# EAGLE board pwm-board (EAGLE 4.16)
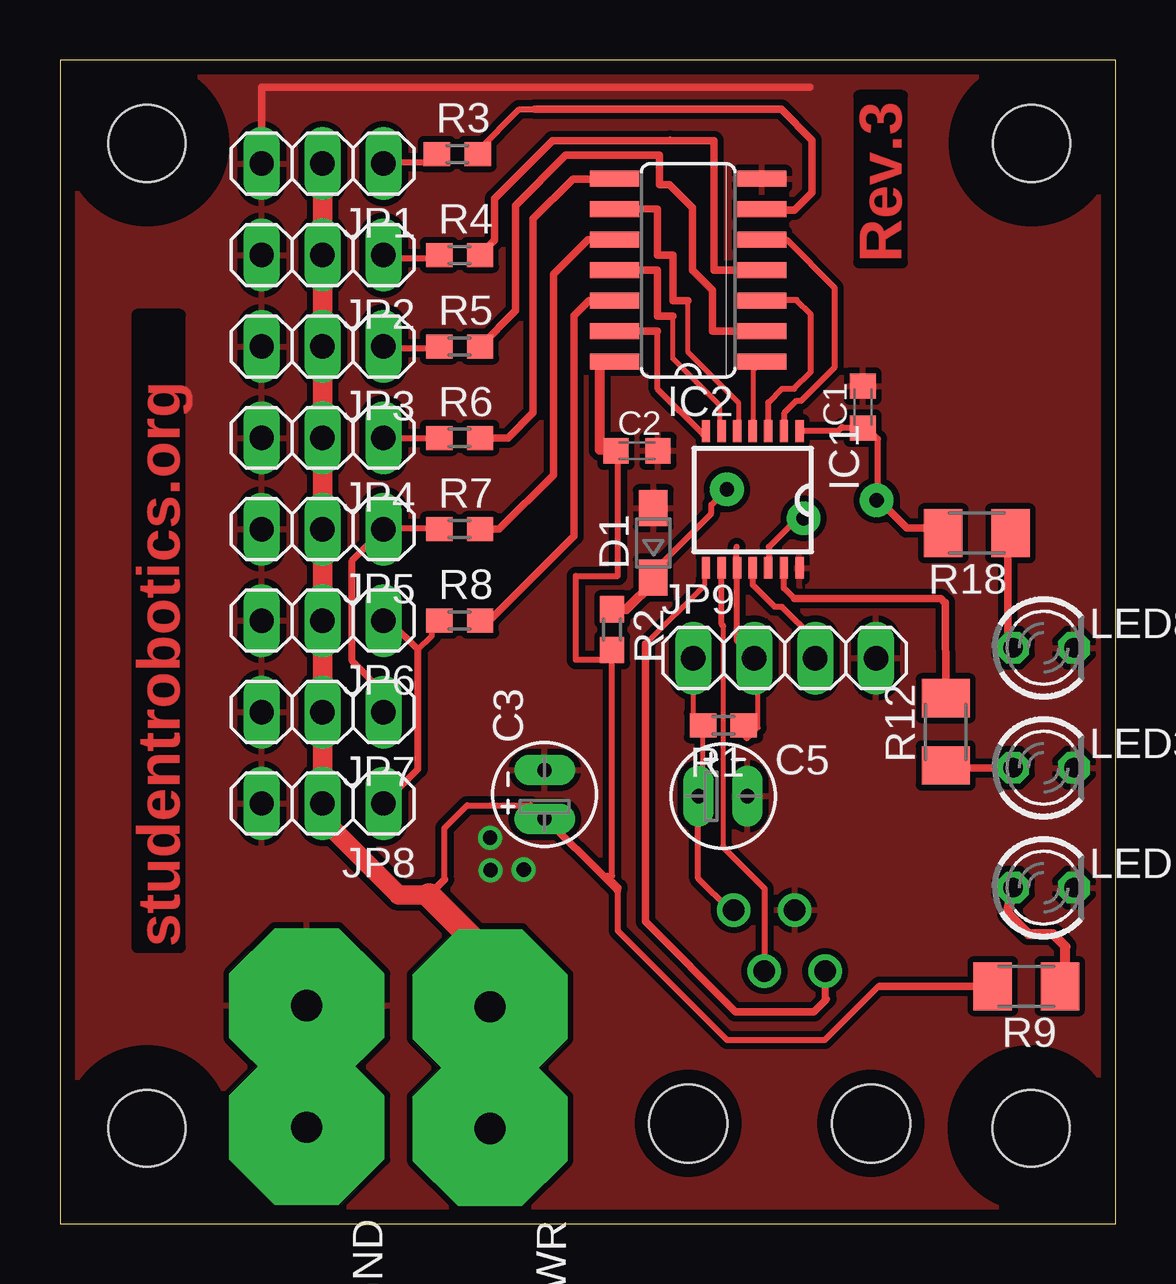
[diagram p0: board, top side]
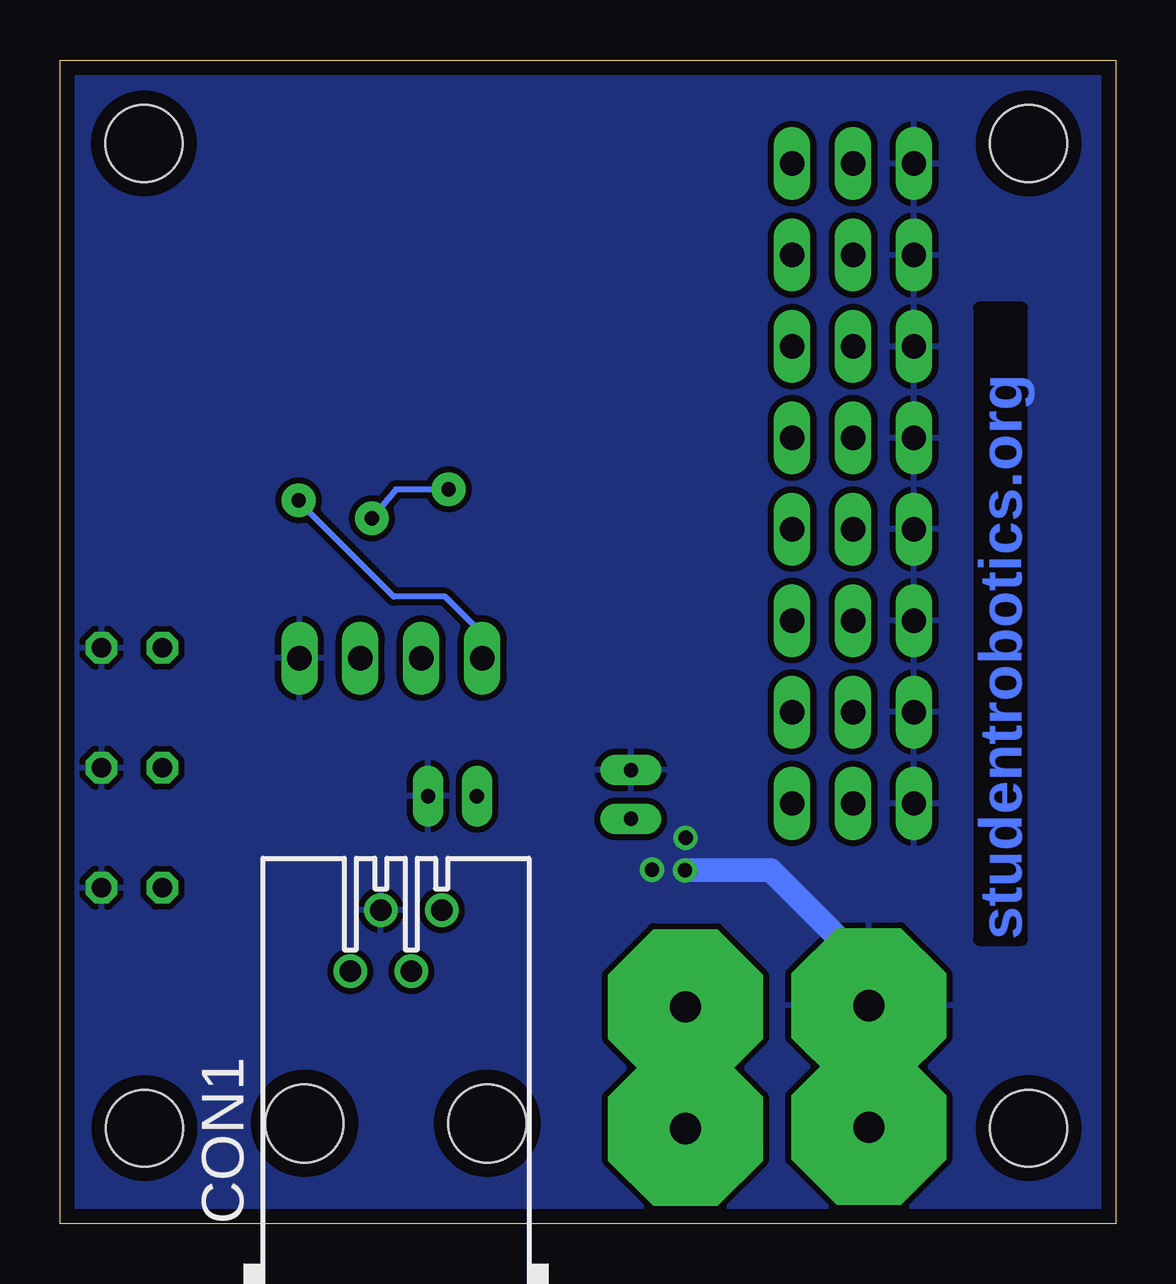
[diagram p1: board, bottom side, seen from below]

Size 44 x 48.5 mm. Coordinates in mm from the lower left corner, seen from the top.
Outline: 0,48.5 0,0 44,0 44,48.5 0,48.5
Copper layers (1*16): Top 0.035mm / dielectric 1.5mm / Bottom 0.035mm
Design rules "default": minimum track width 0.2mm, minimum drill 0.6mm, track to track 0.2mm, track to pad 0.2mm, pad to pad 0.2mm, via to via 0.2mm, smd to smd 0mil, copper to edge 0.6mm, drill to drill 8mil, minimum pad ring 10mil, minimum via ring 8mil, stop-mask expansion 4mil, vias tented up to drill 0mil, thermal gap 10mil
Holes 3.2 mm at 3.62,45.02 40.48,3.98 40.5,45.02 3.62,3.98
tRestrict: area 37.5,42 to 43.5,48; area 37.5,1 to 43.5,7; area 0.6,1 to 6.6,7; area 0.6,42 to 6.6,48

## Footprints (pad centres in the part's own frame; a part is rotated, then mirrored left to right if it is on the bottom)
C0603K = smd 1.05 x 1.08: 1 -0.875,0; 2 0.875,0
E2-4_0.6MMDRILL = drill 0.6 pad 1.27 long: + -1.016,0; - 1.016,0
RJ11-4P4C = drill 0.889 round: 1 1.905,8.89; 2 0.635,6.35; 3 -0.635,8.89; 4 -1.905,6.35 | hole 3.251: -3.81,0; 3.81,0
SOD323-W = smd 1.5 x 1.2: A 1.45,0; C -1.45,0
SPADE = drill 1.3 pad 6.452 octagon: P$1 -5.08,-3.175; P$2 0,-3.175
TSSOP14 = smd 0.9 x 0.35: 1 -2.875,1.95; 2 -2.875,1.3; 3 -2.875,0.65; 4 -2.875,0; 5 -2.875,-0.65; 6 -2.875,-1.3; 7 -2.875,-1.95; 8 2.825,-1.95; 9 2.825,-1.3; 10 2.825,-0.65; 11 2.825,0; 12 2.825,0.65; 13 2.825,1.3; 14 2.825,1.95
SO14 = smd 0.66 x 2.032: 1 -3.81,-3.073; 2 -2.54,-3.073; 3 -1.27,-3.073; 4 0,-3.073; 5 1.27,-3.073; 6 2.54,-3.073; 7 3.81,-3.073; 8 3.81,3.073; 9 2.54,3.073; 10 1.27,3.073; 11 0,3.073; 12 -1.27,3.073; 13 -2.54,3.073; 14 -3.81,3.073
1X03 = drill 1.016 long: 1 -2.54,0; 2 0,0; 3 2.54,0
1X04 = drill 1.016 long: 1 -3.81,0; 2 -1.27,0; 3 1.27,0; 4 3.81,0
LED3MM = drill 0.813 octagon: A -1.27,0; K 1.27,0
R0603 = smd 1.1 x 1: 1 -0.85,0; 2 0.85,0
M1206 = smd 1.6 x 2: 1 -1.4,0; 2 1.4,0

## Placement (x,y rotation side)
C1  100nF  [C0603K]  33.47,34.03 90 top
C2  100nF  [C0603K]  24.05,32.21 0 top
C3  10uF  [E2-4_0.6MMDRILL]  20.2,17.88 90 top
C5  10uF  [E2-4_0.6MMDRILL]  27.64,17.82 0 top
CON1  MODULE_CON  [RJ11-4P4C]  30,4.17 0 bottom
D1  ZENERBZX384-C3V3  [SOD323-W]  24.73,28.37 90 top
GND  4.8X0.8-SPADE  [SPADE]  13.46,4 270 top
IC1  MSP430F2013IPW  [TSSOP14]  28.88,30.16 270 top
IC2  74ACT04D  [SO14]  26.18,39.73 90 top
JP1  [1X03]  10.95,44.18 180 top
JP2  [1X03]  10.95,40.37 180 top
JP3  [1X03]  10.95,36.56 180 top
JP4  [1X03]  10.95,32.75 180 top
JP5  [1X03]  10.95,28.94 180 top
JP6  [1X03]  10.95,25.13 180 top
JP7  [1X03]  10.95,21.32 180 top
JP8  [1X03]  10.95,17.51 180 top
JP9  [1X04]  30.21,23.57 0 top
LED1  [LED3MM]  41,14 0 top
LED3  [LED3MM]  41,19 0 top
LED8  [LED3MM]  41,24 0 top
R1  47K  [R0603]  27.66,20.77 180 top
R2  560  [R0603]  23.01,24.76 270 top
R3  680  [R0603]  16.56,44.58 0 top
R4  680  [R0603]  16.66,40.37 0 top
R5  680  [R0603]  16.66,36.56 0 top
R6  680  [R0603]  16.66,32.75 0 top
R7  680  [R0603]  16.66,28.94 0 top
R8  680  [R0603]  16.66,25.13 0 top
R9  Ask tom  [M1206]  40.28,9.89 180 top
R12  560  [M1206]  36.92,20.49 90 top
R18  560  [M1206]  38.22,28.78 180 top
SERVO-PWR  4.8X0.8-SPADE  [SPADE]  21.11,3.96 270 top

## Library data of the parts
C1 C2 R1-R9 R12 R18 = rcl
C3 C5 CON1 D1 IC1 = ecssr
GND SERVO-PWR = ecssr-Pwr
IC2 = 74xx-eu
JP1-JP9 = pinhead
LED1 LED3 LED8 = led

## Nets
+3V3: C1.1 C5.+ CON1.1 IC1.1 JP9.1 R1.2 R18.2
GND: C1.2 C2.2 C3.- C5.- CON1.3 D1.A GND.P$1 IC1.14 IC2.7 JP1.3 JP2.3 JP3.3 JP4.3 JP5.3 JP6.3 JP7.3 JP8.3 JP9.4 LED1.K LED3.K LED8.K
N$1: JP5.1 JP7.1 R7.1
N$2: JP6.1 JP8.1 R8.1
N$3: D1.C IC1.12 R2.1
N$4: IC2.6 R3.2
N$5: IC2.4 R4.2
N$6: IC1.2 IC2.5
N$7: IC2.2 R5.2
N$8: IC2.8 R6.2
N$9: IC2.10 R7.2
N$10: IC1.3 IC2.3
N$11: IC1.4 IC2.1
N$12: IC1.5 IC2.9
N$13: IC2.12 R8.2
N$14: JP1.1 R3.1
N$15: JP2.1 R4.1
N$16: JP3.1 R5.1
N$17: JP4.1 R6.1
N$18: LED1.A R9.1
N$23: IC1.13 R12.2
N$26: LED3.A R12.1
N$27: LED8.A R18.1
SBWTCK: IC1.11 JP9.3
SBWTDIO: IC1.10 JP9.2 R1.1
SCL: CON1.4 IC1.8
SDA: CON1.2 IC1.9
TCK: IC1.6 IC2.11
TMS: IC1.7 IC2.13
VCC: C2.1 C3.+ IC2.14 JP1.2 JP2.2 JP3.2 JP4.2 JP5.2 JP6.2 JP7.2 JP8.2 R2.2 R9.2 SERVO-PWR.P$1

## Tracks (layer width: path | path; a pad name or v marks a point on that pad's centre or on a via)
+3V3  (via drill 0.6 pad 1.4)
  Top 0.2: 26.8,20.3 R1.2 | JP9.1 26.4,20.7 26.8,20.3 | 26.58,18.45 26.57,18.45 26.8,18.68 26.8,20.3
  Top 0.25: v34.05,30.15 34.1,30.2 34.1,32.7 33.64,33.16 C1.1 32.64,33.16 32.6,33.2 32.43,33.03 IC1.1 | CON1.1 27.93,13.06 26.6,14.39 26.6,17.84 | 26.6,17.84 26.6,18.02 | 26.6,17.84 C5.+
  Top 0.254: C5.+ 26.62,18.03 26.57,18.08 26.57,18.45
  Top 0.305: R18.2 37,28.96 37,29 35.3,29 34.1,30.2
  Bottom 0.2: 26.23,23.57 JP9.1
  Bottom 0.25: JP9.1 26.39,24.57 27.95,26.13 30.09,26.13 34.06,30.1 34.05,30.11 v34.05,30.15
GND  (via drill 0.6 pad 1)
  Top 0.305: 31.27,47.35 8.4,47.35 JP1.3
  Bottom 1: v17.95,14.72 14.38,14.72 10.32,10.68 10.32,9.32 10.5,9.15 10.5,4.35 9.8,3.65 9.82,3.65 10,3.83
  other vias: 17.93,16.07 19.32,14.75
  pour Top (isolate 0.254): 0,48.5 0,0 44,0 44,48.5
  pour Bottom (isolate 0.254): 0,48.5 0,0 44,0 44,48.5
N$1
  Top 0.254: 15.87,29 16,29 | 15.87,29 R7.1 | JP5.1 13.54,29 15.87,29
  Top 0.3: JP5.1 12.18,27.64 12.18,23.44 13.56,22.06 13.56,21.26 13.54,21.26 JP7.1
N$2
  Top 0.254: R8.1 15.68,25 15.5,25 15.5,24.5 14.92,23.92
  Top 0.3: JP8.1 14.92,18.95 14.92,23.92 13.78,25.06 13.55,25.06 JP6.1
N$3  (via drill 0.6 pad 1.4)
  Top 0.25: D1.C 24.88,26.92 24.9,26.9 24.9,27.35 27.15,29.6 27.15,29.95 v27.8,30.6 | v31,29.4 31,29.45 31.15,29.35 30.7,29.35 29.55,28.2 29.55,27.4 29.5,27.35 IC1.12
  Top 0.406: D1.C 24.73,26.77 24.75,26.75 23.61,25.61 R2.1
  Bottom 0.25: v27.8,30.6 30,30.6 v31,29.4
N$4
  Top 0.254: R3.2 17.41,44.69 17.4,44.7 19.14,46.44 19.77,46.44
  Top 0.305: 19.77,46.44 30.06,46.44 31.34,45.16 31.34,42.97 30.61,42.23 29.39,42.23 29.3,42.33 29.26,42.28 IC2.6
N$5
  Top 0.305: R4.2 18.12,40.98 18.12,42.71 20.54,45.12 25.43,45.12 | IC2.4 27.26,39.73 27.26,45.12 25.43,45.12 | 25.43,45.12 25.43,45.15
N$6
  Top 0.25: IC2.5 30.3,41.01 32.3,39 32.3,35.7 30.9,34.3 30.7,34.3 30.2,33.8 30.2,33.01 | 30.2,33.01 30.2,32.9 | IC1.2 30.2,33.01
N$7
  Top 0.305: R5.2 18.99,38.04 18.99,42.44 21.08,44.52 24.99,44.52 24.99,43.3 25,43.3 25.41,43.3 26.36,42.35 26.36,39.74 27.19,38.91 27.19,37.2 IC2.2
N$8
  Top 0.305: R6.2 18.68,32.75 19.73,33.8 19.73,41.88 21.38,43.53 23.1,43.53 IC2.8
N$9
  Top 0.254: IC2.10 23.11,41 23.09,41.01 22.13,41.01
  Top 0.305: R7.2 18.31,28.94 20.57,31.2 20.57,39.58 22,41.01 22.13,41.01
N$10
  Top 0.25: IC1.3 29.52,34.23 30.1,34.8 30.6,34.8 31.3,35.5 31.3,37.9 30.7,38.5 29.2,38.5 29.23,38.47 IC2.3
N$11
  Top 0.2: 28.9,33.01 28.9,32.9 | IC1.4 28.9,33.01 | IC2.1 28.9,35.57 28.9,33.01
N$12
  Top 0.2: 26.18,38.47 26.18,36.31 28.3,34.2 28.3,33.2 28.23,33.12 IC1.5
  Top 0.3: 24.91,42.22 24.92,42.22 24.92,42.27 IC2.9
  Top 0.305: 24.91,42.27 24.91,42.22 24.91,40.37 25.55,40.37 25.55,38.47 26.18,38.47
N$13
  Top 0.254: IC2.12 23.12,38.45 | IC2.12 | 22.05,38.47 23.1,38.47 IC2.12
  Top 0.305: 22.05,38.47 21.43,37.85 21.43,28.66 17.89,25.12 R8.2
N$14
  Top 0.254: 15.88,44.25 16,44.25 | 15.88,44.25 R3.1 | JP1.1 13.55,44.25 15.88,44.25
N$15
  Top 0.254: 15.93,40.25 16,40.25 | 15.93,40.25 R4.1 | JP2.1 13.61,40.25 15.93,40.25
N$16
  Top 0.254: 15.87,36.5 16,36.5 | 15.87,36.5 R5.1 | JP3.1 13.54,36.5 15.87,36.5
N$17
  Top 0.254: 16,32.75 R6.1 JP4.1
N$18
  Top 0.406: LED1.A 39.52,12.92 40.38,12.05 41.4,12.05 41.91,11.55 41.91,10.13 R9.1
N$23
  Top 0.254: IC1.13 30.18,26.49 30.62,26.04
  Top 0.305: R12.2 36.91,25.89 36.89,25.87 36.72,26.04 30.62,26.04
N$26
  Top 0.305: R12.1 37,19.01 37,19 LED3.A
N$27
  Top 0.305: R18.1 39.5,28.66 39.5,24.23 LED8.A
SBWTCK
  Top 0.25: IC1.11 28.88,26.62 29.8,25.7 30.1,25.7 31.4,24.4 31.4,23.6 31.43,23.57 JP9.3
SBWTDIO
  Top 0.2: R1.1 28.55,20.27 28.62,20.2 29.1,20.68 29.1,23.4
  Top 0.25: 29.1,23.4 JP9.2 | JP9.2 | JP9.2 28.23,24.27 IC1.10 28.23,27.48 28.2,27.5 28.2,28.2
SCL
  Top 0.2: 26.88,27.38 26.88,27.45 | 26.88,27.38 IC1.8 | 24.4,24.15 26.88,26.62 26.88,27.38
  Top 0.3: CON1.4 31.9,9.3 31.96,9.36
  Top 0.305: 24.4,24.15 24.4,12.59 28.15,8.83 31.43,8.83 31.9,9.3 | 31.9,9.3
SDA
  Top 0.2: 27.65,15.72 27.65,24.93 27.57,25
  Top 0.25: IC1.9 27.57,25 27.57,24.98 27.65,24.9 | CON1.2 29.38,10.54 29.38,13.95 27.65,15.68 27.65,15.72
TCK
  Top 0.2: 25.55,37.83 25.55,36.05 27.5,34.1 27.5,32.9 27.57,32.98 IC1.6
  Top 0.305: IC2.11 24.91,39.73 24.91,37.83 25.55,37.83
TMS
  Top 0.25: IC1.7 26.8,32.9 24.91,34.78 24.91,37.2
  Top 0.305: 24.91,37.2 IC2.13
VCC
  Top 0.25: 23.25,13.88 23.25,12.21 27.81,7.65 31.88,7.65 34.12,9.89 34.16,9.89
  Top 0.254: 16.02,14.34 16.02,16.48 16.98,17.43 19.62,17.43 20.2,16.85 | 20.2,16.85 20.31,16.74 | 20.2,16.85 C3.+ | 22.81,14.31 22.81,14.5 23.01,14.5 R2.2 23.01,23.5 21.5,23.5 21.5,27 23.25,27 23.25,32.21
  Top 0.3: 10.95,16.88 10.95,16.94 10.94,16.94 10.95,16.95 JP8.2 | 17.9,11.16 SERVO-PWR.P$1 | 15.39,13.7 15.39,13.67
  Top 0.305: 15.39,13.7 16.02,14.34 | 34.16,9.89 R9.2 | 20.2,16.93 20.17,16.96 | C3.+ 20.2,16.93 | 20.2,16.93 22.81,14.31 23.19,13.94 | 23.19,13.94 23.25,13.88 | 23.19,13.94 23.25,14 23.01,14.24 | 23.19,13.94
  Top 0.406: IC2.14 22.5,35.92 22.5,32.25 23.25,32.25 23.25,32.21 C2.1 23,32.21
  Top 0.813: 10.95,16.88 14.12,13.7 15.39,13.7 | JP1.2 JP2.2 JP3.2 JP4.2 JP5.2 JP6.2 JP7.2 JP8.2
  Top 1.016: 15.39,13.67 17.9,11.16

## Text on the board
Top: Rev.3 | studentrobotics.org
Bottom: studentrobotics.org